# EAGLE board FioSaber Prototype C (EAGLE 6.5.0)
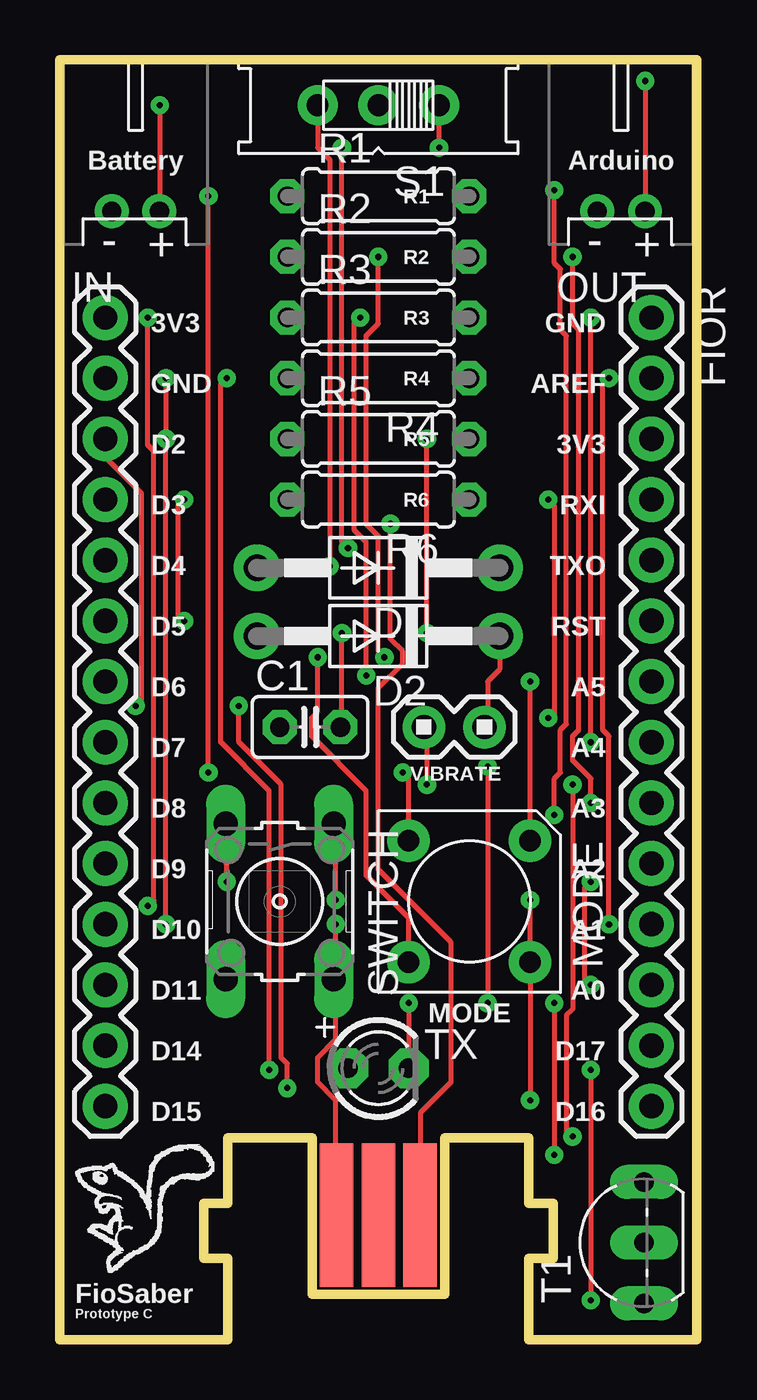
[diagram p0: board, top side]
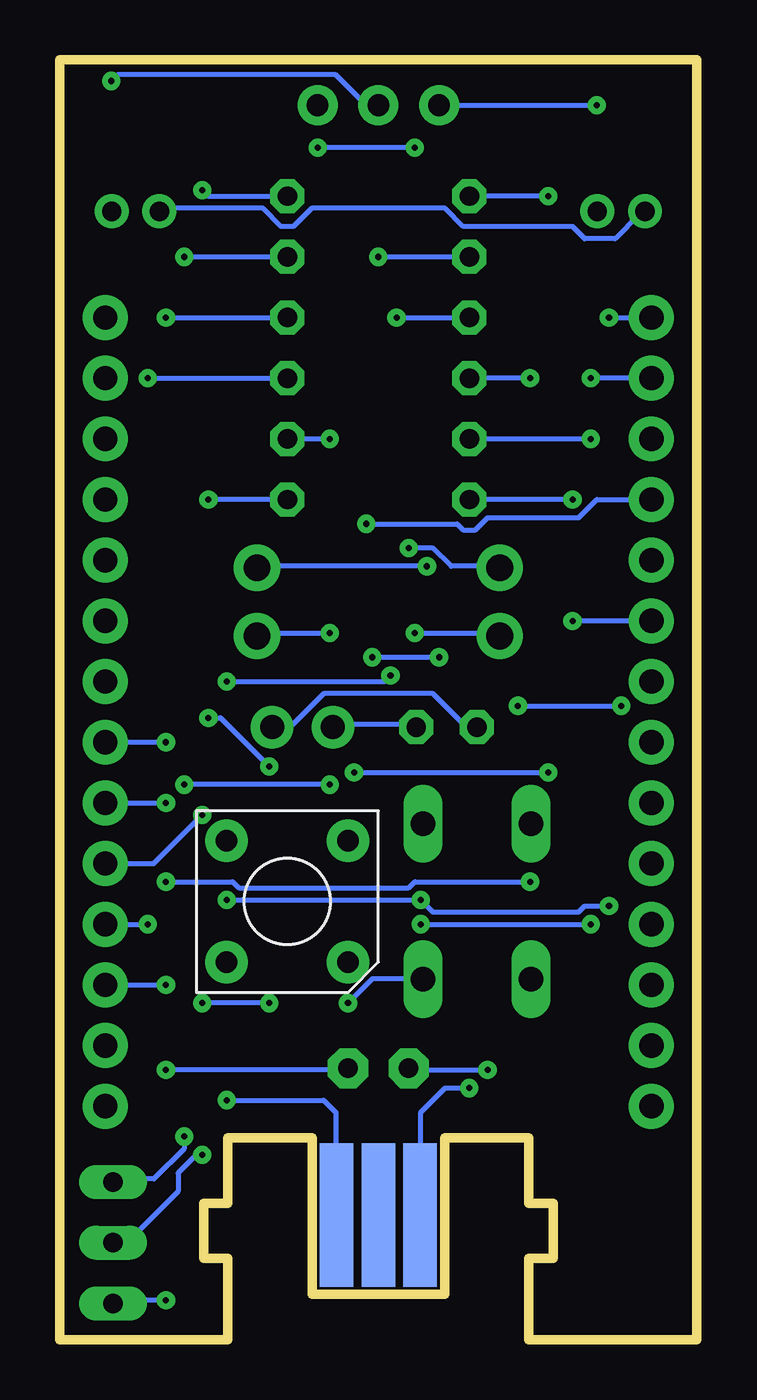
[diagram p1: board, bottom side, seen from below]

Size 26.67 x 53.59 mm. Coordinates in mm from the lower left corner, seen from the top.
Outline: 0,0 7.04,0 7.04,3.4 6.02,3.4 6.02,5.71 7.04,5.71 7.04,8.46 10.57,8.46 10.57,1.91 16.1,1.91 16.1,8.46 19.63,8.46 19.63,5.71 20.65,5.71 20.65,3.4 19.63,3.4 19.63,0 26.67,0 26.67,53.59 0,53.59 0,0
Copper layers (1*16): Top 0.035mm / dielectric 1.5mm / Bottom 0.035mm
Design rules "SparkFun *": minimum track width 8mil, minimum drill 10mil, track to track 7mil, track to pad 7mil, pad to pad 7mil, via to via 7mil, smd to smd 7mil, copper to edge 10mil, drill to drill 8mil, minimum pad ring 12mil, minimum via ring 10mil, stop-mask expansion 4mil, vias tented up to drill 20mil, thermal gap 10mil
Net classes: 0 Default: width 0.203 mm, clearance 0.205 mm; 2 LEDPower: width 0.203 mm; 3 ButtonSignal: width 0.203 mm

## Footprints (pad centres in the part's own frame; a part is rotated, then mirrored left to right if it is on the bottom)
C025-025X050 = drill 0.813 octagon: 1 -1.27,0; 2 1.27,0
DO41-10 = drill 1.118 pad 1.93: A 5.08,0; C -5.08,0
1X14 = drill 1.016 pad 1.88: 1 0,0; 2 2.54,0; 3 5.08,0; 4 7.62,0; 5 10.16,0; 6 12.7,0; 7 15.24,0; 8 17.78,0; 9 20.32,0; 10 22.86,0; 11 25.4,0; 12 27.94,0; 13 30.48,0; 14 33.02,0
JST-PH-2-THM-RA = drill 0.8 pad 1.422: 1 1,0; 2 -1,0
PIRANHA5MM = drill 0.9 pad 1.778: 1 -2.54,2.54; 2 -2.54,-2.54; 3 2.54,-2.54; 4 2.54,2.54
1X2 = drill 1.016 pad 1.778: 1 0,0; 2 2.54,0
MEMOREX_RECEIVER = smd 1.4 x 6 bottom: ATT 0,5.6; PWR -1.75,5.6; SDA 1.75,5.6 | smd 1.4 x 6: GND 1.75,5.6; NC 0,5.6; SCL -1.75,5.6
0207/7 = drill 0.813 octagon: 1 -3.81,0; 2 3.81,0
EG1218 = drill 0.9 pad 1.676: O -2.54,0; P 0,0; S 2.54,0
B3F-10XX = drill 1.016 long: 1 -3.251,2.261; 2 3.251,2.261; 3 -3.251,-2.261; 4 3.251,-2.261
TO92-EBC-OVAL = drill 0.813 long: B 0,-1.27; C 2.54,-1.27; E -2.54,-1.27
LED3MM = drill 0.813 pad 1.676 octagon: A -1.27,0; K 1.27,0

## Placement (x,y rotation side)
C1  0.1µF  [C025-025X050]  10.48,25.65 0 top
D1  1N4004  [DO41-10]  13.33,32.32 180 top
D2  1N4004  [DO41-10]  13.33,29.46 180 top
FIOL  M14  [1X14]  1.91,42.8 270 top
FIOR  M14  [1X14]  24.77,42.8 270 top
IN  [JST-PH-2-THM-RA]  3.17,47.24 0 top
MODE  RGBLED_CA-PIRANHA  [PIRANHA5MM]  17.15,18.35 270 top
MOTOR  1X2  [1X2]  15.24,25.65 0 top
OUT  [JST-PH-2-THM-RA]  23.5,47.24 0 top
P1  WIICHUCK  [MEMOREX_RECEIVER]  13.33,-0.38 0 top
R1  52Ω  [0207/7]  13.33,47.88 0 top
R2  47Ω  [0207/7]  13.33,45.34 0 top
R3  47Ω  [0207/7]  13.33,42.8 0 top
R4  100Ω  [0207/7]  13.33,40.26 180 top
R5  33Ω  [0207/7]  13.33,37.72 0 top
R6  1kΩ  [0207/7]  13.33,35.18 180 top
S1  [EG1218]  13.33,51.69 180 top
SWITCH  [B3F-10XX]  9.21,18.35 270 top
T1  2N2222  [TO92-EBC-OVAL]  23.18,4.06 90 top
TX  [LED3MM]  13.33,11.37 0 top

## Library data of the parts
C1 = rcl
D1 D2 IN MODE OUT R1-R6 S1 T1 TX = adafruit
FIOL FIOR = SparkFun
MOTOR = headers(.1in)
P1 = nintendo
SWITCH = switch-omron; MPN: B3F-1000; OC_FARNELL: 176432; OC_NEWARK: 36M3542

## Nets
N$1: FIOL.1 MODE.4 P1.SDA SWITCH.1
N$2: D1.C IN.1 S1.S
N$3: FIOL.4 P1.GND
N$4: FIOL.3 P1.PWR
N$5: D1.A S1.O
N$6: MODE.2 R1.1
N$7: FIOL.2 P1.SCL R5.1 SWITCH.2 T1.E TX.K
N$8: MODE.3 R2.1
N$9: MODE.1 R3.1
N$10: OUT.1 S1.P
N$11: IN.2 OUT.2
N$12: FIOR.12 SWITCH.3
N$13: FIOR.10 R1.2
N$14: FIOR.9 R2.2
N$15: FIOR.8 R3.2
N$16: FIOL.6 R6.2
N$17: FIOR.11 R4.1
N$18: R6.1 T1.B
N$19: C1.2 D2.A MOTOR.1 T1.C
N$20: C1.1 D2.C MOTOR.2 R5.2
N$25: R4.2 TX.A

## Tracks (layer width: path | path; a pad name or v marks a point on that pad's centre or on a via)
N$1  (via drill 0.25)
  Top 0.203: v11.56,18.41 11.56,21.46 SWITCH.1 | v19.69,18.41 MODE.4 v19.69,10.03 | v3.68,42.8 3.68,37.46 3.94,37.21 3.94,18.41 v3.68,18.16
  Bottom 0.203: v19.69,18.41 v11.56,18.41 11.05,17.91 4.95,17.91 4.7,18.16 v3.68,18.16 | v3.68,42.8 FIOL.1 | v19.69,10.03 15.62,10.03 15.11,9.53 15.11,5.46 P1.SDA
N$2  (via drill 0.25)
  Top 0.203: v4.19,51.69 4.19,47.37 IN.1 | v11.3,32.38 11.3,49.4 10.79,49.91 S1.S
  Bottom 0.203: S1.S v4.19,51.69 | v11.3,32.38 18.42,32.38 D1.C
N$3  (via drill 0.25)
  Top 0.203: v13.84,34.16 13.84,29.34 14.35,28.83 14.35,28.32 13.33,27.3 13.33,19.68 16.38,16.64 16.38,10.79 15.11,9.53 15.11,5.46 P1.GND
  Bottom 0.203: FIOL.4 4.19,35.18 4.95,34.42 8.76,34.42 9.27,33.91 9.78,33.91 10.03,34.16 v13.84,34.16
N$4  (via drill 0.25)
  Top 0.203: FIOL.3 1.91,36.96 3.43,35.43 3.43,26.8 v3.17,26.54 | v7.49,26.54 7.49,25.02 9.27,23.24 9.27,11.81 9.53,11.56 v9.53,10.54
  Bottom 0.203: v7.49,26.54 v3.17,26.54 | v9.53,10.54 10.54,10.54 11.56,9.53 11.56,5.46 P1.PWR
N$5  (via drill 0.25)
  Top 0.203: v15.88,49.91 S1.O | v11.81,49.91 11.81,33.4 v12.06,33.15
  Bottom 0.203: v11.81,49.91 v15.88,49.91 | v12.06,33.15 11.05,33.15 10.29,32.38 8.26,32.38 D1.A
N$6  (via drill 0.25)
  Top 0.203: v6.22,23.75 v6.22,47.88 | v14.35,23.75 14.61,23.5 MODE.2
  Bottom 0.203: v6.22,47.88 R1.1 | v14.35,23.75 v6.22,23.75
N$7  (via drill 0.25)
  Top 0.203: v22.23,11.3 v22.23,1.65 | v4.45,40.26 v4.45,37.72 v4.45,17.4 | P1.SCL 11.56,5.46 11.56,10.03 10.79,10.79 10.79,11.81 11.56,12.57 11.56,14.86 SWITCH.2 11.56,15.11 v11.56,17.4 | v14.61,14.1 TX.K
  Bottom 0.203: v22.23,1.65 24.26,1.65 T1.E | v22.23,11.3 14.61,11.3 TX.K | v4.45,37.72 R5.1 | FIOL.2 v4.45,40.26 | v11.56,17.4 v4.45,17.4 | v14.61,14.1 13.59,15.11 11.56,15.11 SWITCH.2
N$8  (via drill 0.25)
  Top 0.203: v13.33,45.34 13.33,42.54 12.83,42.04 12.83,34.16 13.33,33.65 13.33,28.83 v13.59,28.57 | v10.79,28.57 10.79,26.29 10.54,26.04 10.54,25.27 12.83,22.99 12.83,19.43 14.61,17.65 MODE.3
  Bottom 0.203: v13.33,45.34 R2.1 | v10.79,28.57 v13.59,28.57
N$9  (via drill 0.25)
  Top 0.203: v12.57,42.8 12.32,42.54 12.32,33.91 12.83,33.4 v12.83,27.81 | MODE.1 v19.69,27.56
  Bottom 0.203: v12.57,42.8 R3.1 | v12.83,27.81 13.08,27.56 v19.69,27.56
N$10  (via drill 0.25)
  Top 0.203: v24.51,52.7 24.51,47.37 OUT.1
  Bottom 0.203: v24.51,52.7 24.26,52.96 15.11,52.96 13.84,51.69 S1.P
N$11
  Bottom 0.203: OUT.2 22.48,47.37 18.16,47.37 17.4,46.61 16.89,46.61 16.13,47.37 10.54,47.37 9.78,46.61 5.21,46.61 4.7,46.1 3.43,46.1 2.41,47.12 IN.2
N$12  (via drill 0.25)
  Top 0.203: v6.98,19.18 6.98,21.46 SWITCH.3 | v22.23,19.18 21.97,18.92 21.97,15.11 v22.23,14.86
  Bottom 0.203: v6.98,19.18 11.81,19.18 12.06,18.92 19.18,18.92 19.43,19.18 v22.23,19.18 | FIOR.12 v22.23,14.86
N$13  (via drill 0.25)
  Top 0.203: v20.7,48.13 20.7,45.08 20.96,44.83 20.96,42.29 21.21,42.04 21.21,25.78 20.96,25.53 20.96,23.75 20.7,23.5 v20.7,21.97
  Bottom 0.203: R1.2 20.45,47.88 v20.7,48.13 | v20.7,21.97 22.73,19.94 FIOR.10
N$14  (via drill 0.25)
  Top 0.203: v21.46,45.34 21.46,42.54 21.72,42.29 21.72,25.53 21.46,25.27 21.46,24.26 22.23,23.5 v22.23,22.48
  Bottom 0.203: v21.46,45.34 R2.2 | FIOR.9 v22.23,22.48
N$15  (via drill 0.25)
  Top 0.203: v22.23,25.02 v22.23,42.8
  Bottom 0.203: v22.23,42.8 R3.2 | FIOR.8 v22.23,25.02
N$16  (via drill 0.25)
  Top 0.203: v5.21,35.18 4.95,34.92 4.95,30.35 v5.21,30.1
  Bottom 0.203: v5.21,35.18 R6.2 | FIOL.6 v5.21,30.1
N$17  (via drill 0.25)
  Top 0.203: v22.99,40.26 22.73,40 22.73,25.53 22.99,25.27 v22.99,17.4
  Bottom 0.203: v22.99,40.26 R4.1 | FIOR.11 v22.99,17.4
N$18  (via drill 0.25)
  Top 0.203: v20.7,14.1 v20.7,7.75 | v17.91,24 v17.91,14.1 | v20.45,26.04 20.7,26.04 20.7,34.92 v20.45,35.18
  Bottom 0.203: v20.7,7.75 20.96,7.75 21.72,6.98 21.72,6.22 23.75,4.19 24.26,4.19 T1.B | v17.91,14.1 v20.7,14.1 | v17.91,24 19.94,26.04 v20.45,26.04 | R6.1 v20.45,35.18
N$19  (via drill 0.25)
  Top 0.203: v21.46,8.51 21.21,8.76 21.21,13.59 21.46,13.84 v21.46,23.24 | v15.37,23.24 15.37,25.53 MOTOR.1 | v11.81,29.59 11.81,25.78 C1.2
  Bottom 0.203: C1.2 11.81,25.78 15.11,25.78 MOTOR.1 | v21.46,8.51 21.46,8 22.73,6.73 24.26,6.73 T1.C | v15.37,23.24 v21.46,23.24 | v11.81,29.59 8.26,29.59 D2.A
N$20  (via drill 0.25)
  Top 0.203: v15.37,29.59 v15.37,37.72 | D2.C 18.42,28.07 17.91,27.56 17.91,25.78 MOTOR.2
  Bottom 0.203: MOTOR.2 17.65,25.78 16.89,25.78 15.62,27.05 11.05,27.05 9.78,25.78 9.27,25.78 C1.1 | v15.37,37.72 R5.2 | v15.37,29.59 18.42,29.59 D2.C
N$25  (via drill 0.25)
  Top 0.203: v6.98,40.26 6.73,40 6.73,25.02 8.76,22.99 v8.76,11.3
  Bottom 0.203: v6.98,40.26 R4.2 | v8.76,11.3 12.06,11.3 TX.A

## Text on the board
tPlace: Battery | Arduino | R1 | R2 | 3V3 | R3 | GND | R4 | GND | AREF | D2 | R5 | 3V3 | R6 | D3 | RXI | D4 | TXO | D5 | RST | D6 | A5 | D7 | A4 | VIBRATE | D8 | A3 | D9 | A2 | D10 | A1 | D11 | A0 | MODE | D14 | D17 | D15 | D16 | FioSaber | Prototype C